# Altium PCB Altium PCB.PcbDoc
Units mm, origin at the board's own origin, x right, y up, seen from the top; angles counter-clockwise.
Board outline 60.45 x 60.58 mm, 2 copper layers (Top Layer, Bottom Layer); 45 components, 0 nets, 172 pads, 9 vias.
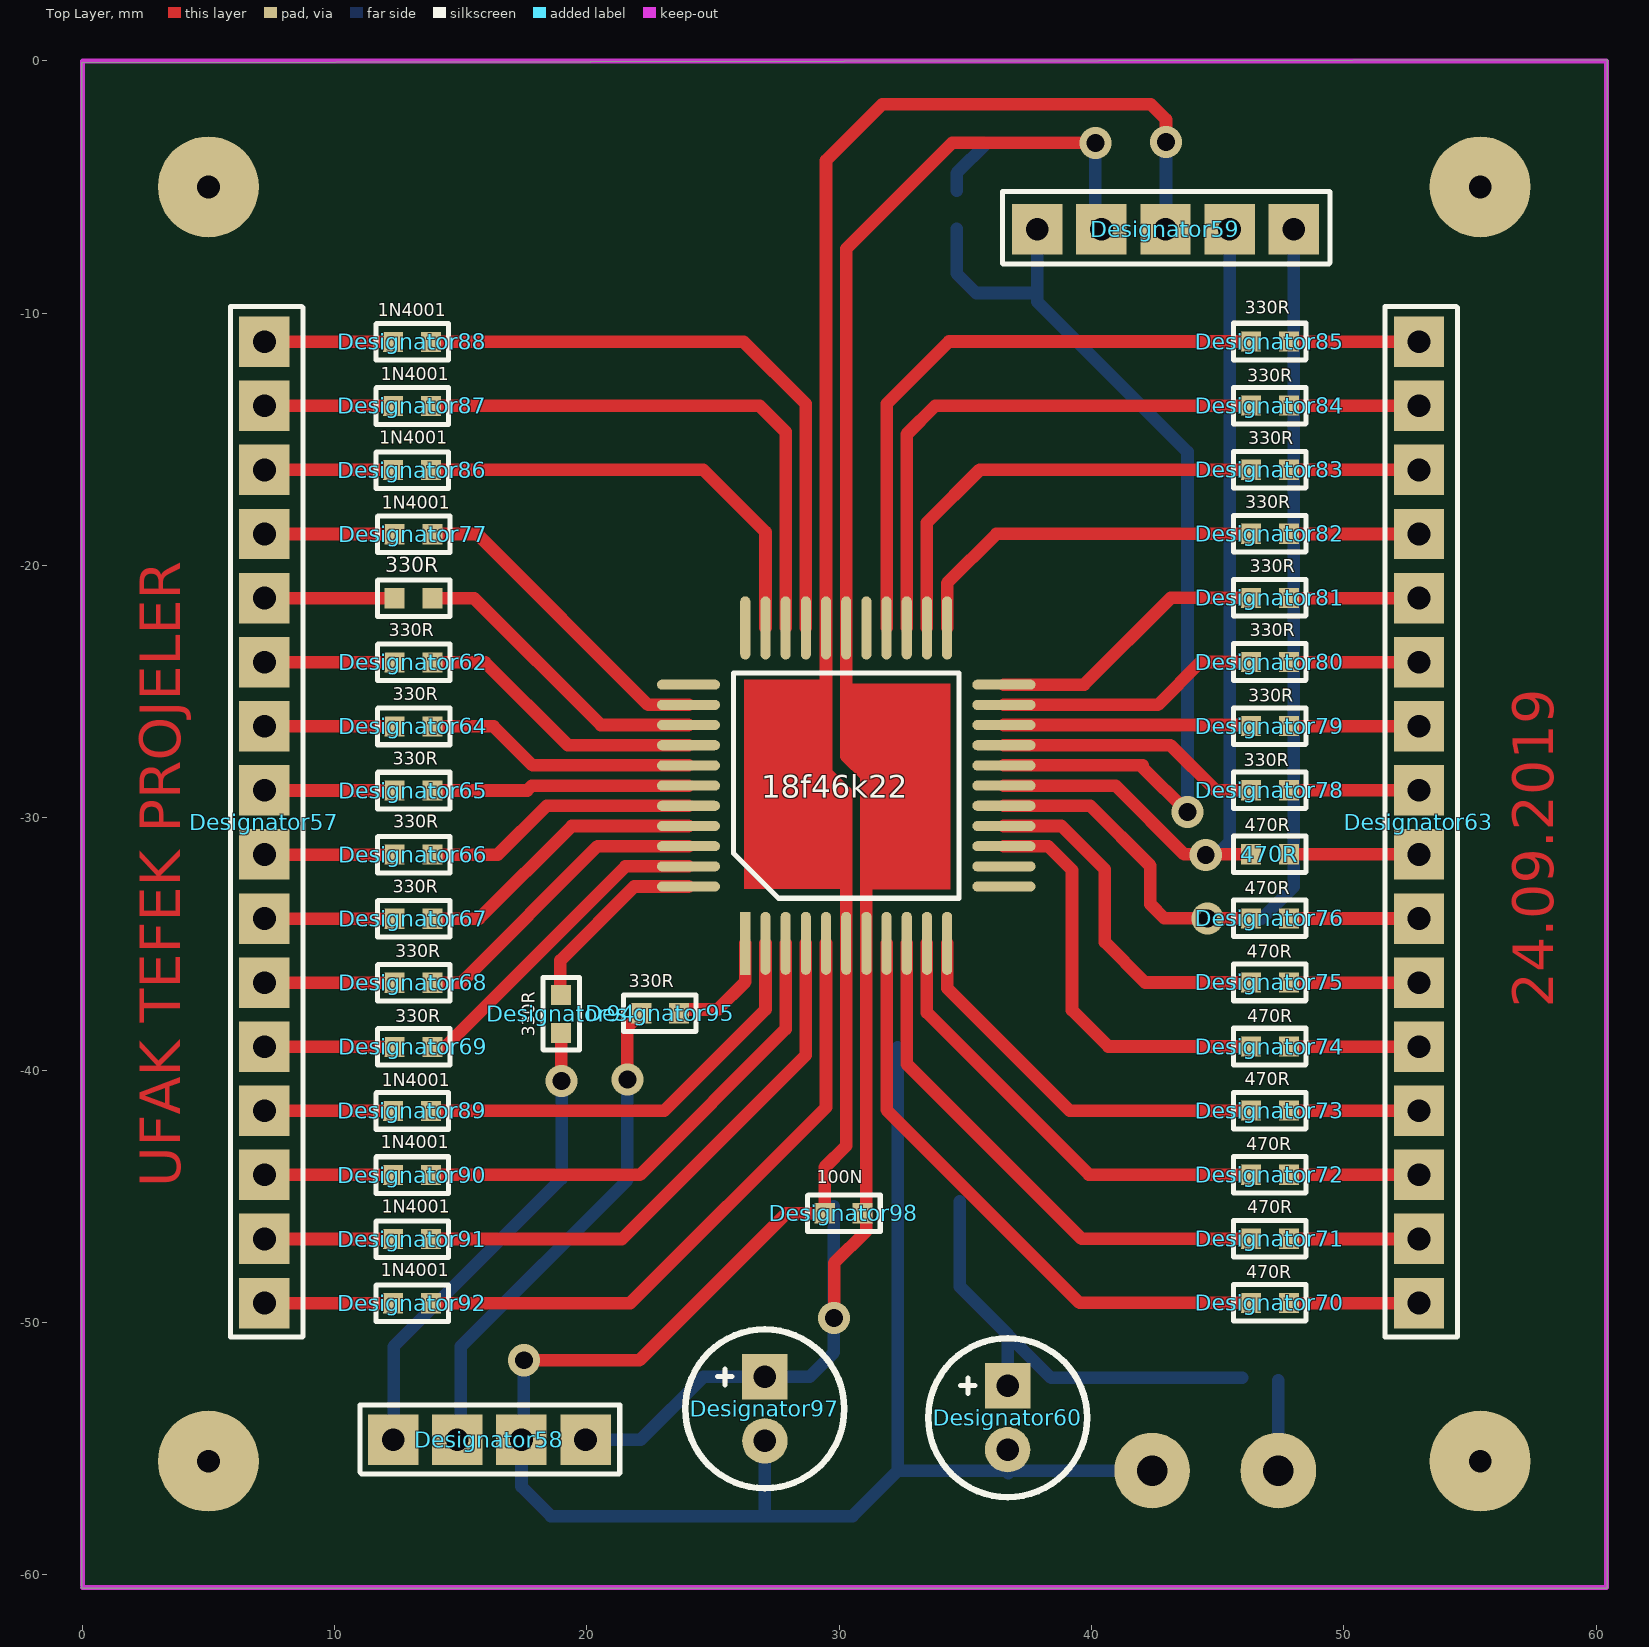
[diagram p0: Top Layer view]
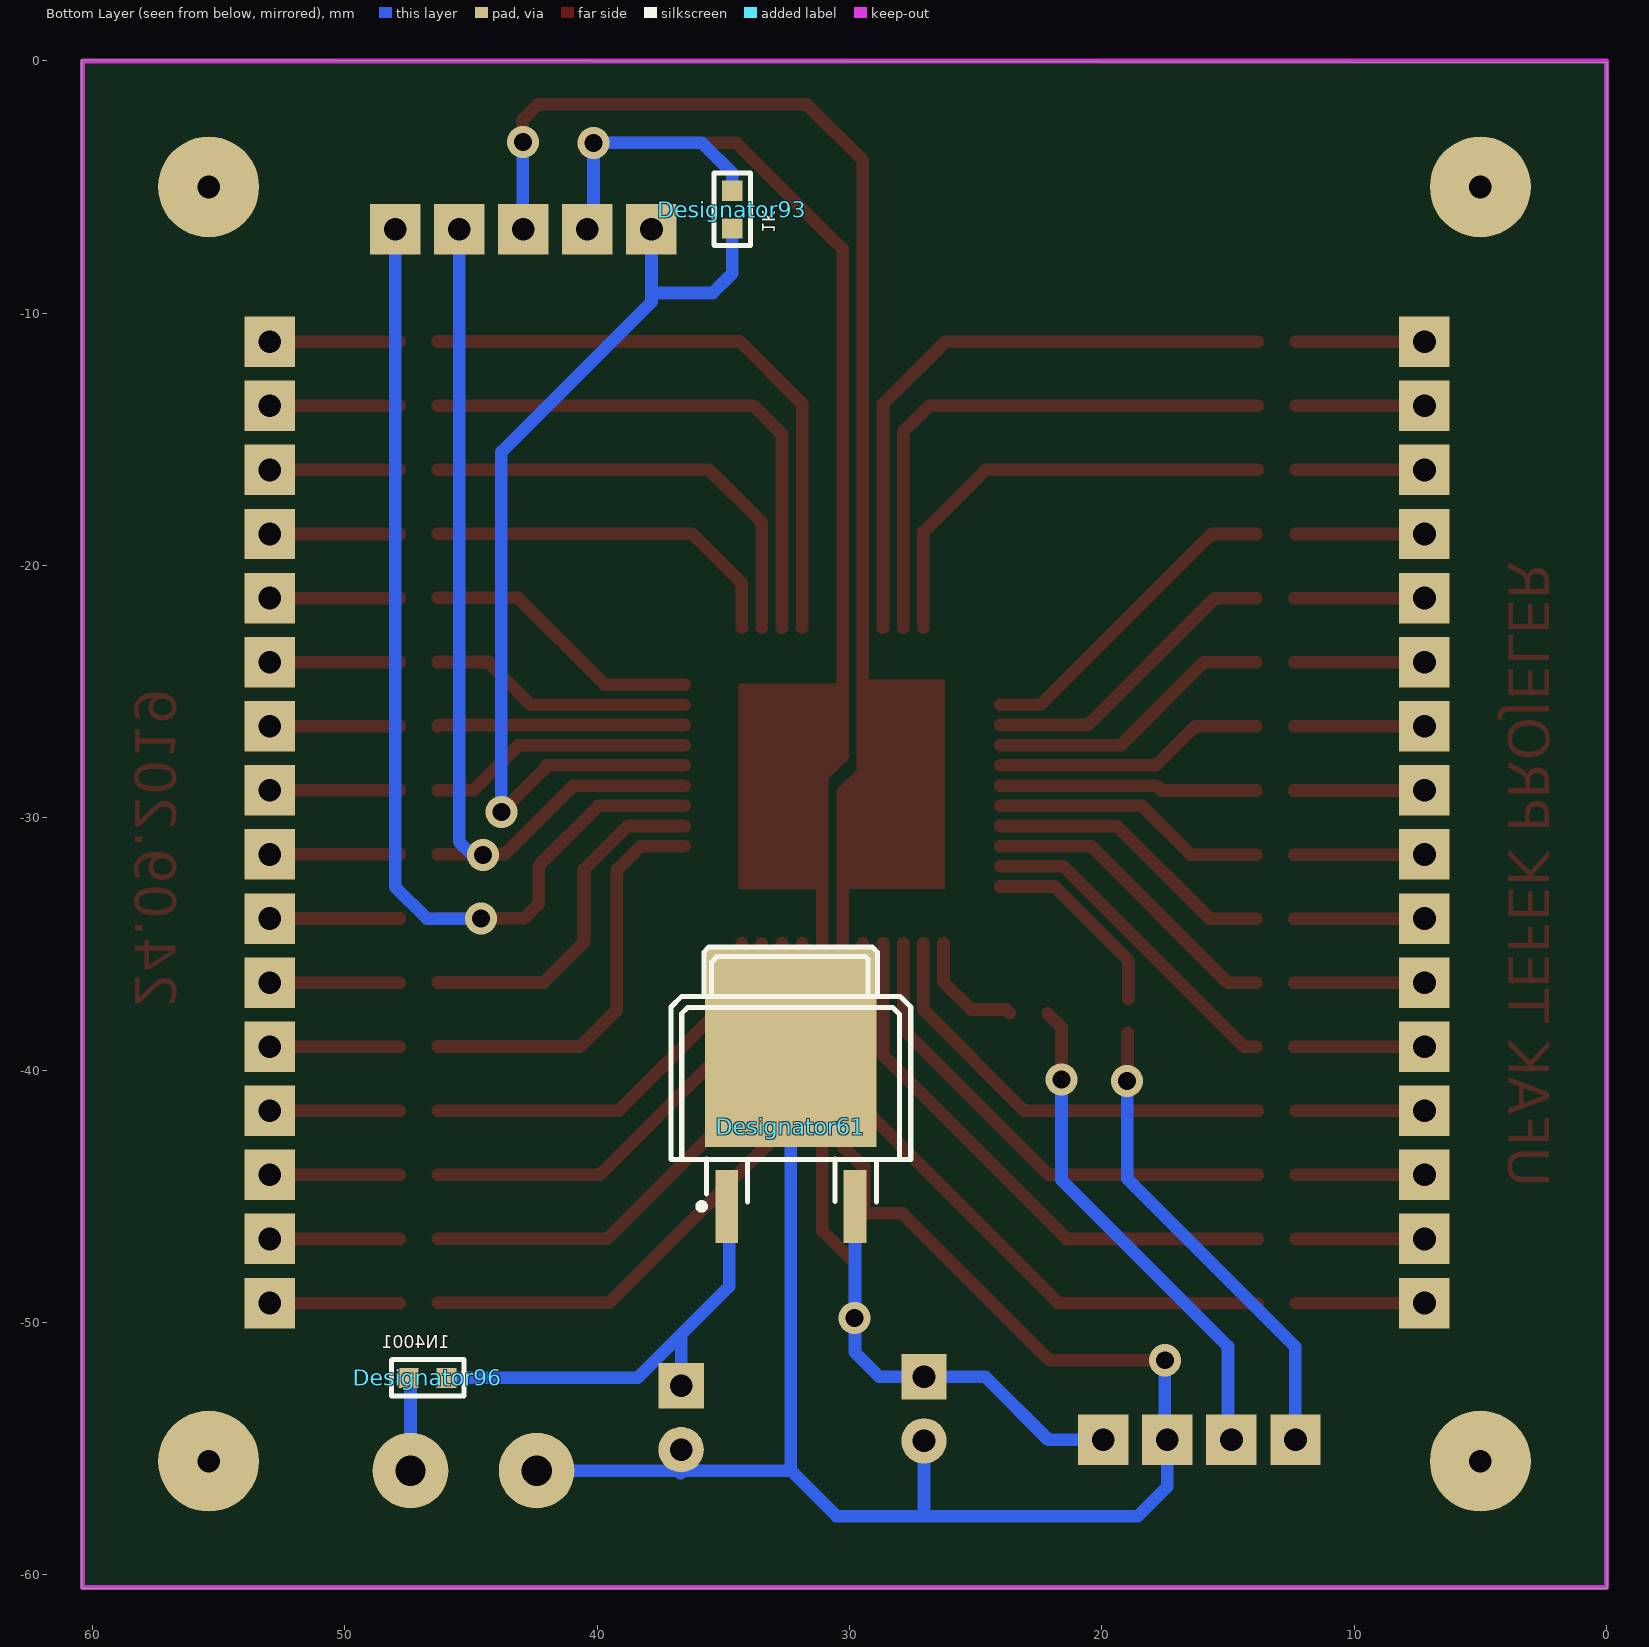
[diagram p1: Bottom Layer view, seen from below]

## Layer stack, top to bottom
Top Solder: solder mask 0.0102, Solder Resist, Dk 3.5
Top Layer: signal copper 0.0356
Dielectric1: dielectric 0.32, FR-4, Dk 4.8
Bottom Layer: signal copper 0.0356
Bottom Solder: solder mask 0.0102, Solder Resist, Dk 3.5

## Board outline
-0.022,-0.084 -0.022,-60.536 60.43,-60.536 60.43,0.043

## Design rules (kind name [scope] priority, off if disabled: settings)
Clearance [All] p1: gap=0.254 ignorepadtopadclearanceinfootprint=FALSE except(0: Arc-Hole Track-Hole SMDPad-Hole THPad-Hole Via-Hole Fill-Hole Poly-Hole Region-Hole Text-Hole)
PolygonConnect [All] p1: connectstyle=Relief reliefconductorwidth=0.254 reliefentries=4 polygonreliefangle="90 Angle" airgapwidth=0.254
RoutingVias [All] p1: holewidth=0.711 width=1.27 viastyle="Through Hole" minholewidth=0.711 minwidth=1.27 maxholewidth=0.711 maxwidth=1.27
SolderMaskExpansion [All] p1: expansion=0.102
Width [All] p1: maxlimit=10 minlimit=0.1 preferedwidth=0.254
30 further rules are at their usual default settings.

## Components (designator, comment, footprint, x,y, rotation, side; value= is the part's Value field where it differs from the comment)
18f46k22 "Comment" "TQFP 44" 26.275,-34.975 r90 top
330R "Comment" 0603#1 13.125,-21.3 r0 top
470R "Comment" 0603#1 47.069,-31.446 r180 top
Designator57 "Comment" "1x16 Header"#1 7.217,-11.133 r270 top
Designator58 "Comment" "1x4 Header" 12.325,-54.65 r0 top
Designator59 "Comment" "1x5 Header" 37.85,-6.675 r0 top
Designator60 "Comment" "470uf 16v Capacitor" 36.675,-53.775 r90 top
Designator61 "Comment" 7805 32.325,-41 r90 bottom
Designator62 "Comment" 0603#1 13.125,-23.84 r0 top
Designator63 "Comment" "1x16 Header"#2 52.977,-11.133 r270 top
Designator64 "Comment" 0603#1 13.125,-26.38 r0 top
Designator65 "Comment" 0603#1 13.125,-28.92 r0 top
Designator66 "Comment" 0603#1 13.125,-31.46 r0 top
Designator67 "Comment" 0603#1 13.125,-34 r0 top
Designator68 "Comment" 0603#1 13.125,-36.54 r0 top
Designator69 "Comment" 0603#1 13.125,-39.08 r0 top
Designator70 "Comment" 0603#1 47.069,-49.226 r180 top
Designator71 "Comment" 0603#1 47.069,-46.686 r180 top
Designator72 "Comment" 0603#1 47.069,-44.146 r180 top
Designator73 "Comment" 0603#1 47.069,-41.606 r180 top
Designator74 "Comment" 0603#1 47.069,-39.066 r180 top
Designator75 "Comment" 0603#1 47.069,-36.526 r180 top
Designator76 "Comment" 0603#1 47.069,-33.986 r180 top
Designator77 "Comment" 0603#2 13.125,-18.76 r0 top
Designator78 "Comment" 0603#1 47.069,-28.906 r180 top
Designator79 "Comment" 0603#1 47.069,-26.366 r180 top
Designator80 "Comment" 0603#1 47.069,-23.826 r180 top
Designator81 "Comment" 0603#1 47.069,-21.286 r180 top
Designator82 "Comment" 0603#1 47.069,-18.746 r180 top
Designator83 "Comment" 0603#1 47.069,-16.206 r180 top
Designator84 "Comment" 0603#1 47.069,-13.666 r180 top
Designator85 "Comment" 0603#1 47.069,-11.126 r180 top
Designator86 "Comment" 0603#2 13.067,-16.22 r0 top
Designator87 "Comment" 0603#2 13.067,-13.68 r0 top
Designator88 "Comment" 0603#2 13.067,-11.14 r0 top
Designator89 "Comment" 0603#2 13.067,-41.62 r0 top
Designator90 "Comment" 0603#2 13.067,-44.16 r0 top
Designator91 "Comment" 0603#2 13.067,-46.7 r0 top
Designator92 "Comment" 0603#2 13.067,-49.24 r0 top
Designator93 "Comment" 0603#1 34.65,-5.9 r90 bottom
Designator94 "Comment" 0603#1 18.975,-37.775 r90 top
Designator95 "Comment" 0603#1 22.9,-37.75 r180 top
Designator96 "Comment" 0603#3 46.725,-52.2 r180 bottom
Designator97 "Comment" "470uf 16v Capacitor" 27.05,-53.425 r90 top
Designator98 "Comment" 0603#2 30.175,-45.675 r0 top

## Footprints (in the part's own frame and the unit in brackets; to place one, negate y for a bottom-side part, rotate by r counter-clockwise, add the part's x,y. Pads: shape width x height; smd on the part's side, far side on the other; paste and mask are expansions set on the pad)
"1x4 Header" [mm]
  rect 2x2 hole 0.9: GND(5.08,0) RX(0,0) TX(2.54,0) VCC(7.62,0)
  silkscreen extent -1.33,-1.35 8.98,1.38
"1x5 Header" [mm]
  rect 2x2 hole 0.9: CLOCK(10.16,0) DATA(7.62,0) GND(5.08,0) MCLR(0,0) VCC(2.54,0)
  silkscreen extent -1.38,-1.38 11.6,1.5
"1x16 Header"#1 [mm]
  rect 2x2 hole 0.9: 17(38.1,0) 18(35.56,0) 19(33.02,0) 20(30.48,0) 21(27.94,0) 22(25.4,0) 23(22.86,0) 24(20.32,0) 25(17.78,0) 26(15.24,0) 27(12.7,0) 28(10.16,0) 29(7.62,0) 30(5.08,0) 31(2.54,0) 32(0,0)
  silkscreen extent -1.4,-1.35 39.45,1.53
"1x16 Header"#2 [mm]
  rect 2x2 hole 0.9: 1(0,0) 2(2.54,0) 3(5.08,0) 4(7.62,0) 5(10.16,0) 6(12.7,0) 7(15.24,0) 8(17.78,0) 9(20.32,0) 10(22.86,0) 11(25.4,0) 12(27.94,0) 13(30.48,0) 14(33.02,0) 15(35.56,0) 16(38.1,0)
  silkscreen extent -1.4,-1.35 39.45,1.53
"470uf 16v Capacitor" [mm]
  rect 1.8x1.8 hole 0.9: +(1.27,0)
  round 1.8 hole 0.9: -(-1.27,0)
  silkscreen extent -3.15,-3.15 3.15,3.15
0603#1 [mm]
  rect 0.8x0.8 smd: 1(-0.75,0) 2(0.75,0)
  silkscreen extent -1.43,-0.72 1.45,0.72
0603#2 [mm]
  rect 0.8x0.8 smd: A(0.75,0) K(-0.75,0)
  silkscreen extent -1.43,-0.72 1.45,0.72
0603#3 [mm]
  rect 0.8x0.8 smd: A(-0.75,0) K(0.75,0)
  silkscreen extent -1.43,-0.72 1.45,0.72
7805 [mm]
  rect 7.9x6.8 smd: GND(1.9,0)
  rect 2.9x0.9 smd: OUT(-4.4,-2.54) Ýn(-4.4,2.54)
  silkscreen extent -4.52,-4.75 5.87,4.75, body extent -4.25,-4.75 3.88,4.75, height 2.03
"TQFP 44" [mm]
  oval 0.4x2.5 smd: A0(7.85,-10.25) A1(8.65,-10.25) A2(9.45,-10.25) A3(10.25,-10.25) B4(3.85,-10.25) B5(4.65,-10.25) B6/CLK(5.45,-10.25) B7/DATA(6.25,-10.25) C1(9.45,2.25) C2(8.65,2.25) C3(7.85,2.25) C4(3.85,2.25) C5(3.05,2.25) C6/TX(2.25,2.25) D0(7.05,2.25) D1(6.25,2.25) D2(5.45,2.25) D3(4.65,2.25) E3/MCLR(7.05,-10.25) NC(2.25,-10.25) NC(3.05,-10.25) NC(10.25,2.25)
  oval 2.5x0.4 smd: A4(12.5,-8) A5(12.5,-7.2) A6(12.5,-1.6) A7(12.5,-2.4) B0(0,-5.6) B1(0,-6.4) B2(0,-7.2) B3(0,-8) C0(12.5,-0.8) D4(0,-0.8) D5(0,-1.6) D6(0,-2.4) D7(0,-3.2) E0(12.5,-6.4) E1(12.5,-5.6) E2(12.5,-4.8) NC(12.5,0) VDD(0,-4.8) VDD(12.5,-4) VSS(0,-4) VSS(12.5,-3.2)
  rect 2.5x0.4 smd: C7/RX(0,0)
  silkscreen extent 1.79,-8.47 10.72,0.47

## Free pads (board coordinates)
  round 4 hole 0.9: 2(5,-5) 3(5,-55.5) 4(55.4,-55.5) 5(55.4,-5)
  round 3 hole 1.2: +(47.4,-55.875) -(42.4,-55.875)

## Via types
v1: diameter 1.27, hole 0.711, Top Layer to Bottom Layer, 9 vias

## Nets (pads, with @x,y where several pads share a name; then routed paths per layer and width w, separated by ;. In a path a pad name is that pad's centre, name@x,y a point inside that pad or via, vN(x,y) a via of type N, cw(c..) or ccw(c..) an arc to the next point about the centre after c; other vN are vias at no path point)
pads on no net: 18f46k22.A0 18f46k22.A1 18f46k22.A2 18f46k22.A3 18f46k22.A4 18f46k22.A5 18f46k22.A6 18f46k22.A7 18f46k22.B0 18f46k22.B1 18f46k22.B2 18f46k22.B3 18f46k22.B4 18f46k22.B5 18f46k22.B6/CLK 18f46k22.B7/DATA 18f46k22.C0 18f46k22.C1 18f46k22.C2 18f46k22.C3 18f46k22.C4 18f46k22.C5 18f46k22.C6/TX 18f46k22.C7/RX 18f46k22.D0 18f46k22.D1 18f46k22.D2 18f46k22.D3 18f46k22.D4 18f46k22.D5 18f46k22.D6 18f46k22.D7 18f46k22.E0 18f46k22.E1 18f46k22.E2 18f46k22.E3/MCLR 18f46k22.NC 18f46k22.VDD 18f46k22.VSS 330R.1 330R.2 470R.1 470R.2 Designator57.17 Designator57.18 Designator57.19 Designator57.20 Designator57.21 Designator57.22 Designator57.23 Designator57.24 Designator57.25 Designator57.26 Designator57.27 Designator57.28 Designator57.29 Designator57.30 Designator57.31 Designator57.32 Designator58.GND Designator58.RX Designator58.TX Designator58.VCC Designator59.CLOCK Designator59.DATA Designator59.GND Designator59.MCLR Designator59.VCC Designator60.+ Designator60.- Designator61.GND Designator61.OUT Designator61.Ýn Designator62.1 Designator62.2 Designator63.1 Designator63.2 Designator63.3 Designator63.4 Designator63.5 Designator63.6 Designator63.7 Designator63.8 Designator63.9 Designator63.10 Designator63.11 Designator63.12 Designator63.13 Designator63.14 Designator63.15 Designator63.16 Designator64.1 Designator64.2 Designator65.1 Designator65.2 Designator66.1 Designator66.2 Designator67.1 Designator67.2 Designator68.1 Designator68.2 Designator69.1 Designator69.2 Designator70.1 Designator70.2 Designator71.1 Designator71.2 Designator72.1 Designator72.2 Designator73.1 Designator73.2 Designator74.1 Designator74.2 Designator75.1 Designator75.2 Designator76.1 Designator76.2 Designator77.A Designator77.K Designator78.1 Designator78.2 Designator79.1 Designator79.2 Designator80.1 Designator80.2 Designator81.1 Designator81.2 Designator82.1 Designator82.2 Designator83.1 Designator83.2 Designator84.1 Designator84.2 Designator85.1 Designator85.2 Designator86.A Designator86.K Designator87.A Designator87.K Designator88.A Designator88.K Designator89.A Designator89.K Designator90.A Designator90.K Designator91.A Designator91.K Designator92.A Designator92.K Designator93.1 Designator93.2 Designator94.1 Designator94.2 Designator95.1 Designator95.2 Designator96.A Designator96.K Designator97.+ Designator97.- Designator98.A Designator98.K
copper on no net: | length 1052.5
  Top Layer w0.5: 7.217,-49.233 12.31,-49.233 ; 7.217,-46.693 12.31,-46.693 ; 7.217,-44.153 12.31,-44.153 ; 7.217,-41.613 12.31,-41.613 ; 7.217,-21.293 7.224,-21.3 12.375,-21.3 ; 7.217,-18.753 12.31,-18.753 ; 7.217,-16.213 12.31,-16.213 ; 7.217,-13.673 12.31,-13.673 ; 7.217,-11.133 12.31,-11.133 ; 7.224,-39.08 12.375,-39.08 ; 7.224,-34 12.375,-34 ; 7.224,-31.46 12.375,-31.46 ; 7.224,-28.92 12.375,-28.92 ; 7.224,-26.38 12.375,-26.38 ; 7.224,-23.84 12.375,-23.84 ; 7.265,-36.54 12.375,-36.54 ; 13.817,-49.233 21.717,-49.233 29.475,-41.475 29.475,-34.975 ; 13.817,-46.693 21.382,-46.693 28.675,-39.4 28.675,-34.975 ; 13.817,-44.153 22.097,-44.153 27.875,-38.375 27.875,-34.975 ; 13.817,-41.613 23.062,-41.613 27.075,-37.6 27.075,-34.975 ; 13.817,-16.213 24.613,-16.213 27.075,-18.675 27.075,-22.475 ; 13.817,-13.673 26.848,-13.673 27.875,-14.7 27.875,-22.475 ; 13.817,-11.133 26.208,-11.133 28.675,-13.6 28.675,-22.475 ; 13.875,-39.08 14.37,-39.08 21.525,-31.925 24.025,-31.925 ; 13.875,-36.54 15.01,-36.54 20.425,-31.125 24.025,-31.125 ; 13.875,-34 15.725,-34 19.4,-30.325 24.025,-30.325 ; 13.875,-31.46 16.465,-31.46 18.4,-29.525 24.025,-29.525 ; 13.875,-28.92 17.63,-28.92 17.825,-28.725 24.025,-28.725 ; 13.875,-26.38 16.305,-26.38 17.85,-27.925 24.025,-27.925 ; 13.875,-23.84 15.965,-23.84 19.25,-27.125 24.025,-27.125 ; 13.875,-21.3 15.525,-21.3 20.55,-26.325 24.025,-26.325 ; 13.875,-18.753 15.653,-18.753 22.425,-25.525 24.025,-25.525 ; v1(17.5,-51.5) 22.075,-51.5 27.9,-45.675 29.425,-45.675 29.425,-43.85 30.275,-43 30.275,-34.975 30.275,-29 29.475,-28.2 29.475,-22.475 29.475,-3.95 31.7,-1.725 42.35,-1.725 42.95,-2.325 v1(42.95,-3.225) ; 18.95,-37.175 18.95,-35.65 21.875,-32.725 24.025,-32.725 ; 18.975,-38.525 18.975,-40.4 v1(19,-40.425) ; v1(21.6,-40.375) 21.6,-38.3 22.15,-37.75 ; 23.65,-37.75 23.8,-37.6 25.175,-37.6 26.275,-36.5 26.275,-34.975 ; v1(29.8,-49.825) 29.8,-47.65 31.075,-46.375 31.075,-34.975 31.075,-28.35 30.275,-27.55 30.275,-22.475 30.275,-7.45 34.475,-3.25 v1(40.15,-3.25) ; 31.875,-34.975 31.875,-41.575 39.526,-49.226 46.319,-49.226 ; 31.875,-22.475 31.875,-13.6 34.349,-11.126 46.319,-11.126 ; 32.675,-34.975 32.675,-39.75 39.611,-46.686 46.319,-46.686 ; 32.675,-22.475 32.675,-14.8 33.809,-13.666 46.319,-13.666 ; 33.475,-34.975 33.475,-37.725 39.896,-44.146 46.319,-44.146 ; 33.475,-22.475 33.475,-18.3 35.569,-16.206 46.319,-16.206 ; 34.275,-34.975 34.275,-36.75 39.131,-41.606 46.319,-41.606 ; 34.275,-22.475 34.275,-20.7 36.229,-18.746 46.319,-18.746 ; 36.525,-31.125 38.275,-31.125 39.225,-32.075 39.225,-37.625 40.666,-39.066 46.319,-39.066 ; 36.525,-30.325 38.8,-30.325 40.525,-32.05 40.525,-34.925 42.126,-36.526 46.319,-36.526 ; 36.525,-29.525 39.95,-29.525 42.325,-31.9 42.325,-33.425 42.886,-33.986 46.319,-33.986 ; 36.525,-28.725 40.95,-28.725 43.671,-31.446 46.319,-31.446 ; 36.525,-27.925 42.025,-27.925 42.025,-28 v1(43.8,-29.775) ; 36.525,-27.125 43.125,-27.125 44.906,-28.906 46.319,-28.906 ; 36.525,-26.325 46.278,-26.325 46.319,-26.366 ; 36.525,-25.525 42.625,-25.525 44.324,-23.826 46.319,-23.826 ; 36.525,-24.725 39.7,-24.725 43.139,-21.286 46.319,-21.286 ; 47.826,-49.233 52.977,-49.233 ; 47.826,-46.693 52.977,-46.693 ; 47.826,-44.153 52.977,-44.153 ; 47.826,-41.613 52.977,-41.613 ; 47.826,-39.073 52.977,-39.073 ; 47.826,-36.533 52.977,-36.533 ; 47.826,-33.993 52.977,-33.993 ; 47.826,-31.453 52.977,-31.453 ; 47.826,-28.913 52.977,-28.913 ; 47.826,-26.373 52.977,-26.373 ; 47.826,-23.833 52.977,-23.833 ; 47.826,-21.293 52.977,-21.293 ; 47.826,-18.753 52.977,-18.753 ; 47.826,-16.213 52.977,-16.213 ; 47.826,-13.673 52.977,-13.673 ; 47.826,-11.133 52.977,-11.133
  Bottom Layer w0.5: 12.325,-54.65 12.342,-54.633 12.342,-53.375 12.342,-50.958 19,-44.3 v1(19,-40.425) ; 14.865,-54.65 15,-54.515 15,-52.675 15,-50.95 21.6,-44.35 v1(21.6,-40.375) ; v1(17.5,-51.5) 17.5,-54.555 17.405,-54.65 17.405,-56.505 18.575,-57.675 30.525,-57.675 32.388,-55.812 ; 19.945,-54.65 22.125,-54.65 24.62,-52.155 27.05,-52.155 28.82,-52.155 29.785,-51.19 29.785,-49.81 29.785,-45.4 ; 20.1,-54.035 20.59,-54.525 ; 27.05,-57.675 27.05,-54.695 ; 32.325,-39.1 32.325,-55.75 32.45,-55.875 42.4,-55.875 ; 34.65,-6.65 34.65,-8.425 35.425,-9.2 37.85,-9.2 ; 34.65,-5.15 34.65,-4.45 35.85,-3.25 v1(40.15,-3.25) 40.15,-6.435 40.39,-6.675 ; 34.775,-45.2 34.775,-48.575 38.4,-52.2 45.975,-52.2 ; 36.588,-50.387 36.675,-50.475 36.675,-52.505 ; 36.675,-55.045 36.675,-55.95 36.7,-55.975 ; 37.85,-6.675 37.85,-9.55 43.8,-15.5 v1(43.8,-29.775) ; 42.93,-6.675 42.95,-6.655 v1(42.95,-3.225) ; v1(44.525,-31.475) 44.95,-31.475 45.47,-30.955 45.47,-6.675 ; v1(44.6,-34) 46.75,-34 48.01,-32.74 48.01,-6.675 ; 47.4,-55.875 47.4,-52.3

## Keep-outs
Keep-Out Layer:
  lines w0.2: 0,-60.5 60.4,-60.5 60.4,0 0,0 0,-60.4

## Other copper
Top Layer:
  rectangle: 29.1,-28.525 29.4,-28.275
  rectangle: 29.1,-29.175 29.925,-28.4
  rectangle: 29.25,-32.825 30.275,-29
  rectangle: 30.35,-27.725 31.375,-24.675
  rectangle: 30.625,-28.1 31.175,-24.675
  rectangle: 26.225,-32.825 29.25,-24.525
  rectangle: 31.175,-32.85 34.4,-24.675
  text "24.09.2019" at 58.3,-37.525 h1.6 r90
  text "UFAK TEFEK PROJELER" at 3.875,-44.65 h1.6 r90

## Silkscreen, mask and mechanical layers (free items; w line width, h text height)
Top Overlay:
  text "330R" at 46.075,-10.025 h0.5
  text "1N4001" at 11.7,-10.125 h0.5
  text "1N4001" at 11.825,-12.65 h0.5
  text "330R" at 46.175,-12.725 h0.5
  text "1N4001" at 11.775,-15.175 h0.5
  text "330R" at 46.2,-15.2 h0.5
  text "330R" at 46.1,-17.725 h0.5
  text "1N4001" at 11.875,-17.75 h0.5
  text "330R" at 46.275,-20.275 h0.5
  text "330R" at 12.15,-22.8 h0.5
  text "330R" at 46.275,-22.8 h0.5
  text "330R" at 12.3,-25.35 h0.5
  text "330R" at 46.2,-25.4 h0.5
  text "330R" at 12.3,-27.9 h0.5
  text "330R" at 46.025,-27.95 h0.5
  text "330R" at 12.325,-30.4 h0.5
  text "470R" at 46.075,-30.525 h0.5
  text "330R" at 12.3,-32.975 h0.5
  text "470R" at 46.075,-33.025 h0.5
  text "330R" at 12.4,-35.525 h0.5
  text "470R" at 46.15,-35.55 h0.5
  text "330R" at 21.65,-36.725 h0.5
  text "330R" at 12.4,-38.1 h0.5
  text "470R" at 46.175,-38.1 h0.5
  text "330R" at 17.925,-38.675 h0.5 r90
  text "470R" at 46.075,-40.6 h0.5
  text "1N4001" at 11.875,-40.65 h0.5
  text "1N4001" at 11.825,-43.1 h0.5
  text "470R" at 46.125,-43.175 h0.5
  text "100N" at 29.1,-44.475 h0.5
  text "1N4001" at 11.875,-45.65 h0.5
  text "470R" at 46.175,-45.675 h0.5
  text "1N4001" at 11.825,-48.175 h0.5
  text "470R" at 46.125,-48.25 h0.5
Bottom Overlay:
  text "1K" at 33.45,-6.825 h0.5 r90
  text "1N4001" at 45.85,-51.025 h0.5